# Altium PCB 毕设.PcbDoc
Units mm, origin at the board's own origin, x right, y up, seen from the top; angles counter-clockwise.
Board outline 90.17 x 65.02 mm, 2 copper layers (Top Layer, Bottom Layer); 5 components, 14 nets, 61 pads, 0 vias.
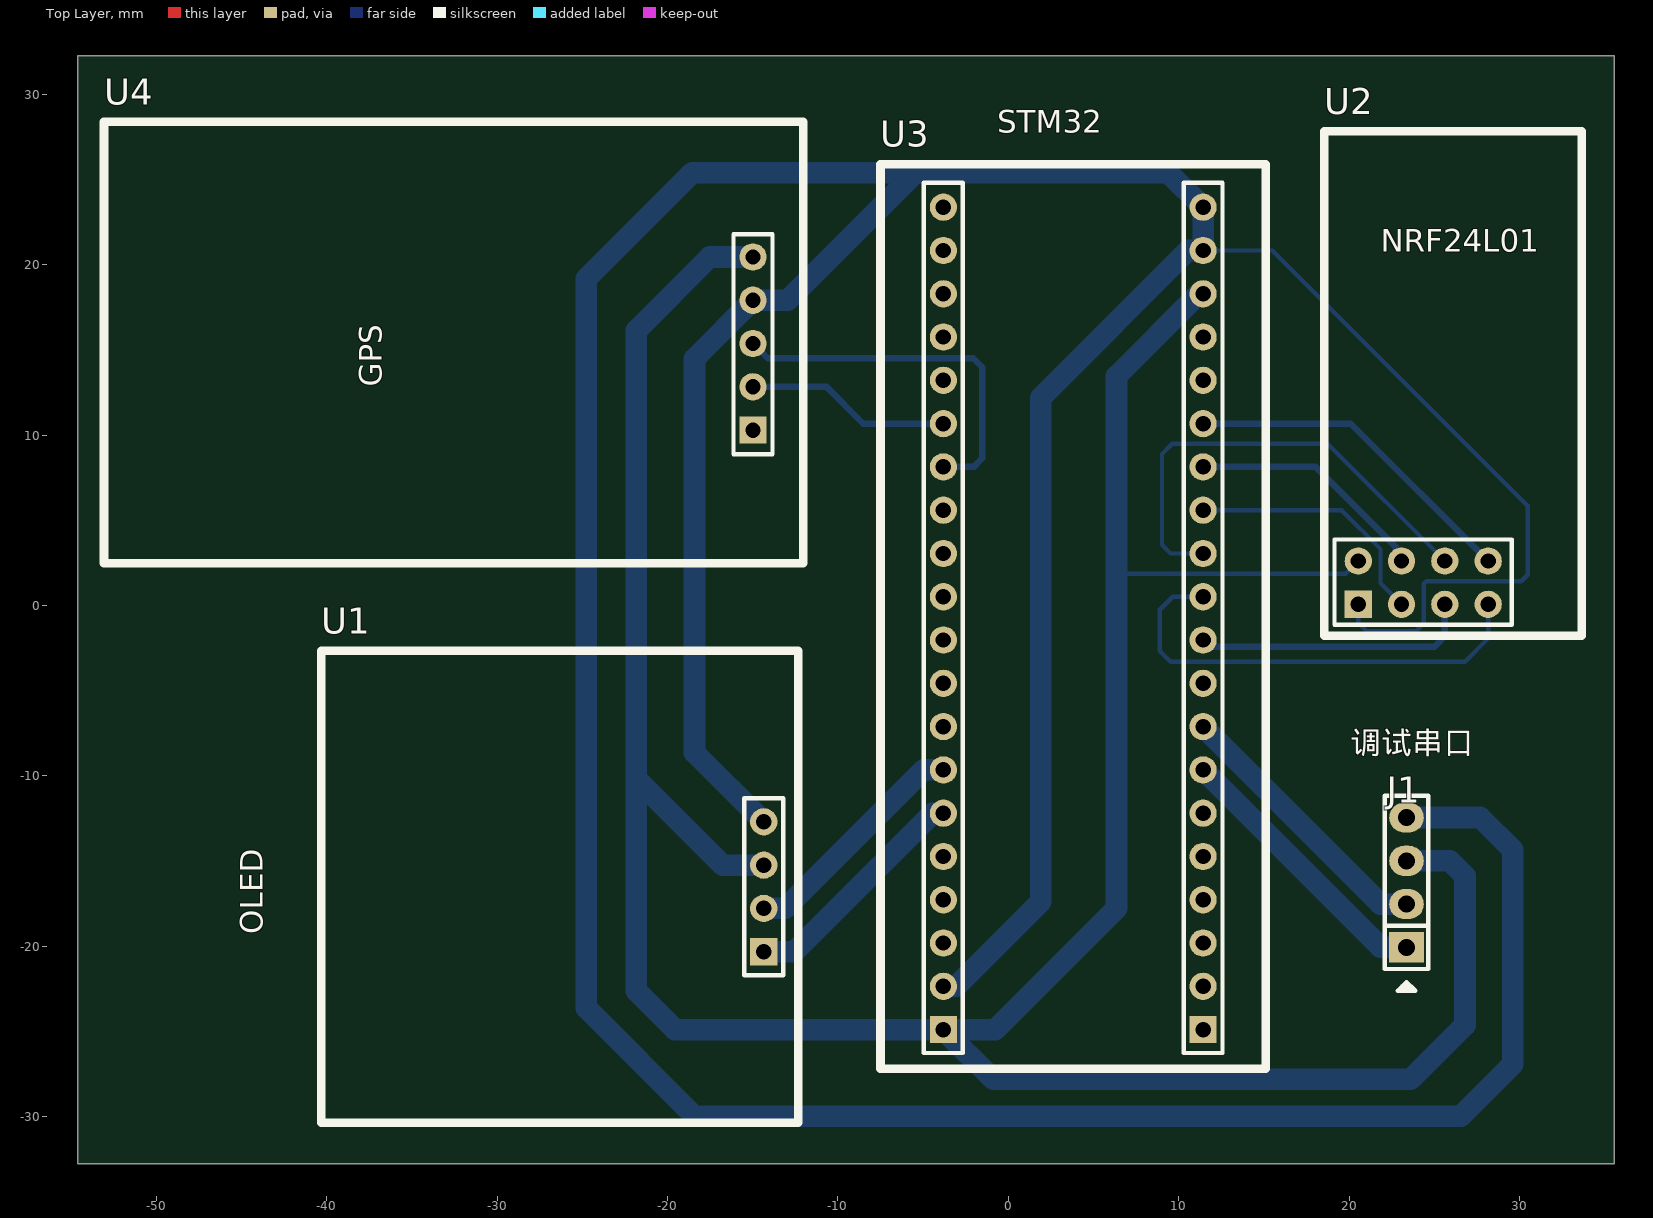
[diagram p0: Top Layer view]
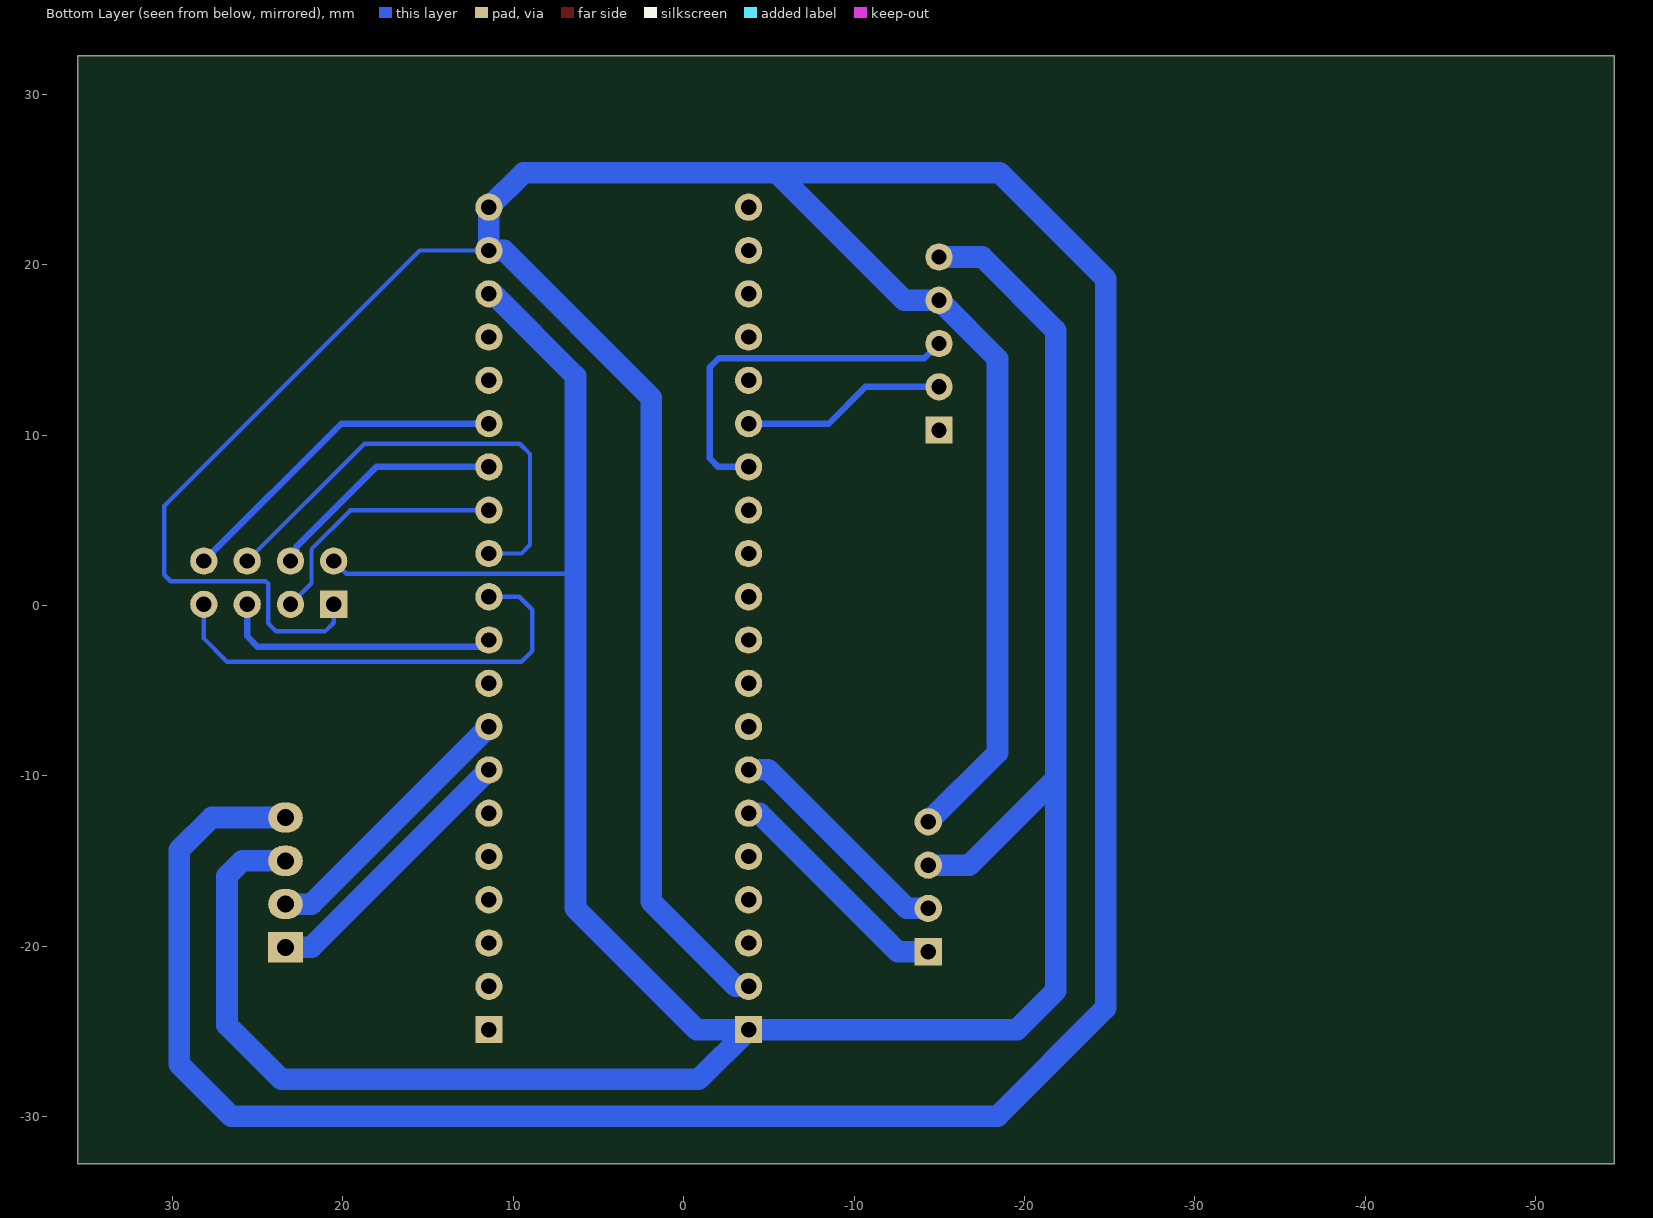
[diagram p1: Bottom Layer view, seen from below]

## Layer stack, top to bottom
Top Solder: solder mask 0.0102, Solder Resist, Dk 3.5
Top Layer: signal copper 0.0356
Dielectric 1: dielectric 0.32, FR-4, Dk 4.8
Bottom Layer: signal copper 0.0356
Bottom Solder: solder mask 0.0102, Solder Resist, Dk 3.5

## Board outline
-54.61,-32.766 35.56,-32.766 35.56,32.258 -54.61,32.258

## Design rules (kind name [scope] priority, off if disabled: settings)
Clearance [All] p1: gap=0.254 ignorepadtopadclearanceinfootprint=FALSE except(0: Arc-Hole Track-Hole SMDPad-Hole THPad-Hole Via-Hole Fill-Hole Poly-Hole Region-Hole Text-Hole)
PolygonConnect [All] p1: connectstyle=Relief reliefconductorwidth=0.254 reliefentries=4 polygonreliefangle="90 Angle" airgapwidth=0.254
RoutingVias [All] p1: holewidth=0.711 width=1.27 viastyle="Through Hole" minholewidth=0.711 minwidth=1.27 maxholewidth=0.711 maxwidth=1.27
SolderMaskExpansion [All] p1: expansion=0.102
Width [All] p1: maxlimit=2.54 minlimit=0.254 preferedwidth=1.27
30 further rules are at their usual default settings.

## Components (designator, comment, footprint, x,y, rotation, side; value= is the part's Value field where it differs from the comment)
J1 "HDR1x4" PIN-4-2.54-1.0 23.368,-16.256 r90 top
U1 "OLED" OLED -26.289,-16.383 r0 top
U2 "NRF24L01" NRF24L01 26.035,11.176 r270 top
U3 "STM32F103C8T6" STM32F103C8T6 3.81,-0.762 r0 top
U4 "GPS" GPS -33.53,15.806 r0 top

## Footprints (in the part's own frame and the unit in brackets; to place one, negate y for a bottom-side part, rotate by r counter-clockwise, add the part's x,y. Pads: shape width x height; smd on the part's side, far side on the other; paste and mask are expansions set on the pad)
GPS [mm]
  rect 1.6x1.6 hole 0.9: 1(18.544,-5.519)
  round 1.6 hole 0.9: 2(18.544,-2.979) 3(18.544,-0.439) 4(18.544,2.101) 5(18.544,4.641)
  silkscreen extent -19.54,-13.33 21.48,12.57, body extent 17.29,-6.91 19.79,6.04, height 8.6
NRF24L01 [mm]
  rect 1.6x1.6 hole 0.9: 1(11.112,-5.498)
  round 1.6 hole 0.9: 2(8.572,-5.498) 3(11.112,-2.958) 4(8.572,-2.958) 5(11.112,-0.418) 6(8.572,-0.418) 7(11.112,2.122) 8(8.572,2.122)
  silkscreen extent -16.64,-7.49 12.95,7.62, body extent 7.31,-6.9 12.31,3.51, height 8.6
OLED [mm]
  rect 1.6x1.6 hole 0.9: 1(11.938,-3.937)
  round 1.6 hole 0.9: 2(11.938,-1.397) 3(11.938,1.143) 4(11.938,3.683)
  silkscreen extent -14.03,-13.97 13.97,13.72, body extent 10.69,-5.33 13.19,5.08, height 8.6
PIN-4-2.54-1.0 [mil] "Pin Header"
  rect 70x80 hole 39.37: 1(-150,0)
  oval 70x80 hole 39.37: 2(-50,0) 3(50,0) 4(150,0)
  silkscreen extent -250,-50 200,50, body extent -200,-50 200,50, height 398
STM32F103C8T6 [mm]
  rect 1.6x1.6 hole 0.9: 1(7.62,-24.13) 21(-7.62,-24.13)
  round 1.6 hole 0.9: 2(7.62,-21.59) 3(7.62,-19.05) 4(7.62,-16.51) 5(7.62,-13.97) 6(7.62,-11.43) 7(7.62,-8.89) 8(7.62,-6.35) 9(7.62,-3.81) 10(7.62,-1.27) 11(7.62,1.27) 12(7.62,3.81) 13(7.62,6.35) 14(7.62,8.89) 15(7.62,11.43) 16(7.62,13.97) 17(7.62,16.51) 18(7.62,19.05) 19(7.62,21.59) 20(7.62,24.13) 22(-7.62,-21.59) 23(-7.62,-19.05) 24(-7.62,-16.51) 25(-7.62,-13.97) 26(-7.62,-11.43) 27(-7.62,-8.89) 28(-7.62,-6.35) 29(-7.62,-3.81) 30(-7.62,-1.27) 31(-7.62,1.27) 32(-7.62,3.81) 33(-7.62,6.35) 34(-7.62,8.89) 35(-7.62,11.43) 36(-7.62,13.97) 37(-7.62,16.51) 38(-7.62,19.05) 39(-7.62,21.59) 40(-7.62,24.13)
  silkscreen extent -11.31,-26.43 11.3,26.66, body extent -8.86,-25.53 8.88,25.52, height 8.6

## Part data
J1: "Connector"

## Nets (pads, with @x,y where several pads share a name; then routed paths per layer and width w, separated by ;. In a path a pad name is that pad's centre, name@x,y a point inside that pad or via, vN(x,y) a via of type N, cw(c..) or ccw(c..) an arc to the next point about the centre after c; other vN are vias at no path point)
CE: U2.3 U3.13 | length 15.1
  Bottom Layer w0.254: U3.13 19.558,5.588 21.844,3.302 21.844,1.297 U2.3
CLK: U2.5 U3.10 | length 16.5
  Bottom Layer w0.381: U3.10 11.811,-2.413 25.019,-2.413 25.617,-1.815 U2.5
CS: U2.4 U3.14 | length 14.2
  Bottom Layer w0.381: U3.14 18.034,8.128 22.733,3.429 22.733,2.948 U2.4
GND: J1.4 U1.4 U2.1 U3.19 U3.20 U3.22 U4.4 | length 302.9
  Bottom Layer w0.254: U3.19 15.494,20.828 30.48,5.842 30.48,1.804 30.099,1.423 24.537,1.423 24.384,1.27 24.384,-1.053 23.913,-1.524 21.045,-1.524 20.537,-1.016 U2.1
  Bottom Layer w1.27: U1.4 -18.415,-8.636 -18.415,14.478 U4.4 -12.954,17.907 -5.461,25.4 ; U3.22 -3.048,-22.352 1.905,-17.399 1.905,12.192 10.541,20.828 U3.19 U3.20 9.398,25.4 -5.461,25.4 ; J1.4 27.686,-12.446 29.591,-14.351 29.591,-26.924 26.543,-29.972 -18.415,-29.972 -24.765,-23.622 -24.765,19.177 -18.542,25.4 -5.461,25.4
IRQ: U2.8 U3.15 | length 20.1
  Bottom Layer w0.381: U3.15 20.093,10.668 U2.8
MISO: U2.7 U3.11 | length 27.4
  Bottom Layer w0.254: U3.11 9.652,0.508 8.89,-0.254 8.89,-2.667 9.525,-3.302 26.797,-3.302 28.157,-1.942 U2.7
MOSI: U2.6 U3.12 | length 27.7
  Bottom Layer w0.254: U3.12 9.525,3.048 9.017,3.556 9.017,8.89 9.614,9.487 18.734,9.487 U2.6
RX: U3.35 U4.2 | length 12.1
  Bottom Layer w0.381: U4.2 -10.668,12.827 -8.509,10.668 U3.35
RX2: J1.1 U3.7 | length 16.5
  Bottom Layer w1.27: U3.7 21.844,-20.066 J1.1@23.622,-20.066
SCL: U1.2 U3.27 | length 13.9
  Bottom Layer w1.27: U1.2 -13.081,-17.78 -4.953,-9.652 U3.27
SDA: U1.1 U3.26 | length 13.9
  Bottom Layer w1.27: U1.1 -12.573,-20.32 -4.445,-12.192 U3.26
TX: U3.34 U4.3 | length 21.9
  Bottom Layer w0.381: U4.3 -14.122,14.503 -2.057,14.503 -1.524,13.97 -1.524,8.636 -2.032,8.128 U3.34
TX2: J1.2 U3.8 | length 16.5
  Bottom Layer w1.27: U3.8 21.844,-17.526 J1.2@23.622,-17.526
VCC: J1.3 U1.3 U2.2 U3.18 U3.21 U4.5 | length 187.7
  Bottom Layer w0.254: 6.223,1.867 6.35,1.867 19.8,1.867 U2.2
  Bottom Layer w1.27: U4.5 -17.526,20.447 -21.844,16.129 -21.844,-10.16 ; U1.3 -16.764,-15.24 -21.844,-10.16 ; U3.18 11.176,18.288 6.35,13.462 6.35,1.867 6.35,-17.78 -0.762,-24.892 U3.21 ; J1.3 25.908,-14.986 26.797,-15.875 26.797,-24.638 23.622,-27.813 -0.889,-27.813 U3.21 ; -21.844,-10.16 -21.844,-22.606 -19.558,-24.892 U3.21
pads on no net: U3.1 U3.2 U3.3 U3.4 U3.5 U3.6 U3.9 U3.16 U3.17 U3.23 U3.24 U3.25 U3.28 U3.29 U3.30 U3.31 U3.32 U3.33 U3.36 U3.37 U3.38 U3.39 U3.40 U4.1

## Silkscreen, mask and mechanical layers (free items; w line width, h text height)
Top Overlay:
  text "STM32" at -0.635,27.305 h2.29
  text "NRF24L01" at 21.844,20.32 h2.29
  text "GPS" at -36.322,12.827 h2.29 r90
  text "调试串口" at 20.066,-9.144 h2.29
  text "OLED" at -43.307,-19.304 h2.29 r90
Mechanical 15:
  lines w0.5: 35.487,-32.766 -54.513,-32.766 -54.513,32.234 35.487,32.234 ; 35.53,-32.766 35.53,32.234